# Altium PCB NEW_PCB_2021-01-19 (1).pcbdoc
Units mm, origin at the board's own origin, x right, y up, seen from the top; angles counter-clockwise.
Board outline 72.17 x 33.42 mm, 2 copper layers (Top Layer, Bottom Layer); 1 components, 0 nets, 12 pads, 0 vias.
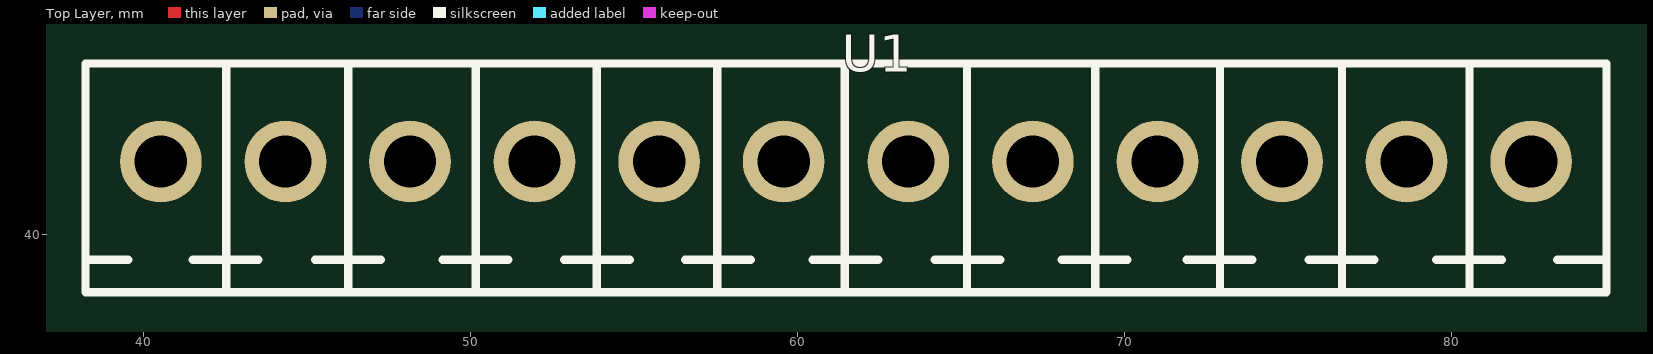
[diagram p0: Top Layer view]
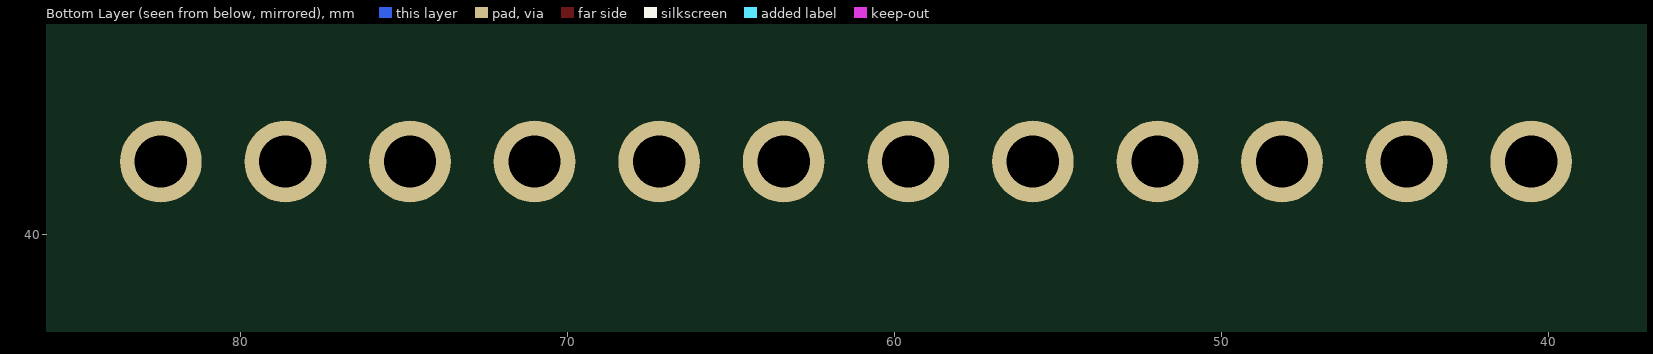
[diagram p1: Bottom Layer view, seen from below]

## Layer stack, top to bottom
Top Layer: signal copper (thickness not stored)
Dielectric: dielectric 0.32, FR-4, Dk 4.8
Bottom Layer: signal copper (thickness not stored)

## Board outline
97.574,25.4 25.4,25.4 25.4,58.817 97.574,58.817

## Components (designator, comment, footprint, x,y, rotation, side; value= is the part's Value field where it differs from the comment)
U1 "CONN-TH_12P-P3.81_KF2EDGV-3.81-12P" CONN-TH_12P-P3.81_KF2EDGV-3.81-12P 61.487,42.227 r0 top

## Footprints (in the part's own frame and the unit in brackets; to place one, negate y for a bottom-side part, rotate by r counter-clockwise, add the part's x,y. Pads: shape width x height; smd on the part's side, far side on the other; paste and mask are expansions set on the pad)
CONN-TH_12P-P3.81_KF2EDGV-3.81-12P [mm]
  round 2.5 hole 1.6: 1(-20.955,0) 2(-17.145,0) 3(-13.335,0) 4(-9.525,0) 5(-5.715,0) 6(-1.905,0) 7(1.905,0) 8(5.715,0) 9(9.525,0) 10(13.335,0) 11(17.145,0) 12(20.955,0)
  silkscreen extent -23.26,-4 23.26,3

## Nets (pads, with @x,y where several pads share a name; then routed paths per layer and width w, separated by ;. In a path a pad name is that pad's centre, name@x,y a point inside that pad or via, vN(x,y) a via of type N, cw(c..) or ccw(c..) an arc to the next point about the centre after c; other vN are vias at no path point)
pads on no net: U1.1 U1.2 U1.3 U1.4 U1.5 U1.6 U1.7 U1.8 U1.9 U1.10 U1.11 U1.12

## Silkscreen, mask and mechanical layers (free items; w line width, h text height)
Document:
  lines w0.003: 61.462,42.083 61.512,42.134